# Altium PCB Arduino Demo Shield PCB.PcbDoc
Units mil, origin at the board's own origin, x right, y up, seen from the top; angles counter-clockwise.
Board outline 6000 x 4000 mil, 2 copper layers (Top Layer, Bottom Layer); 10 components, 8 nets, 69 pads, 0 vias.
Unrouted connection lines stored in the file: 3.
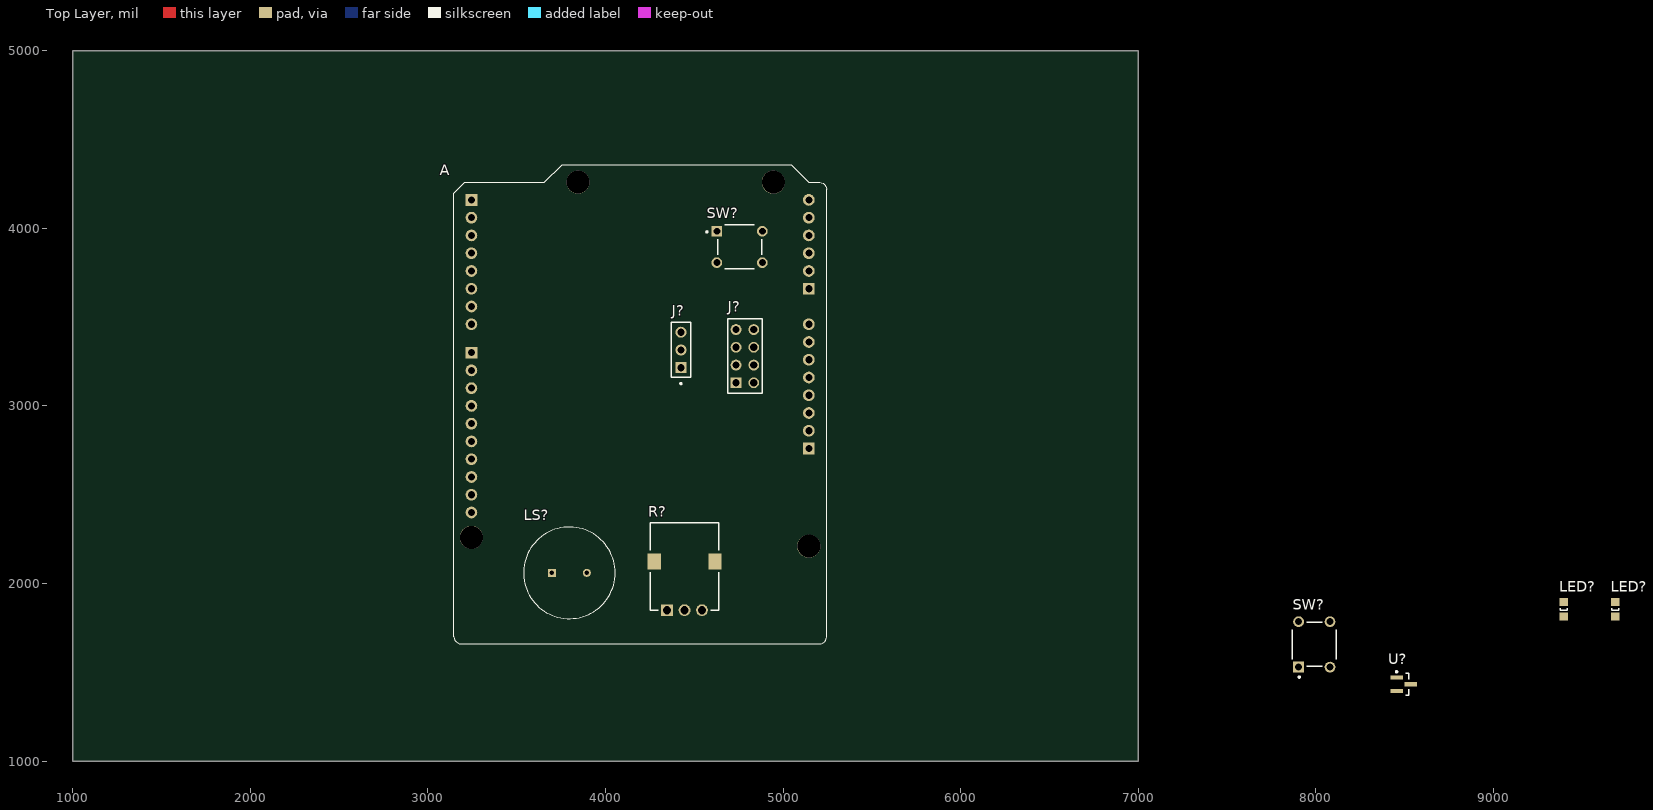
[diagram p0: Top Layer view]
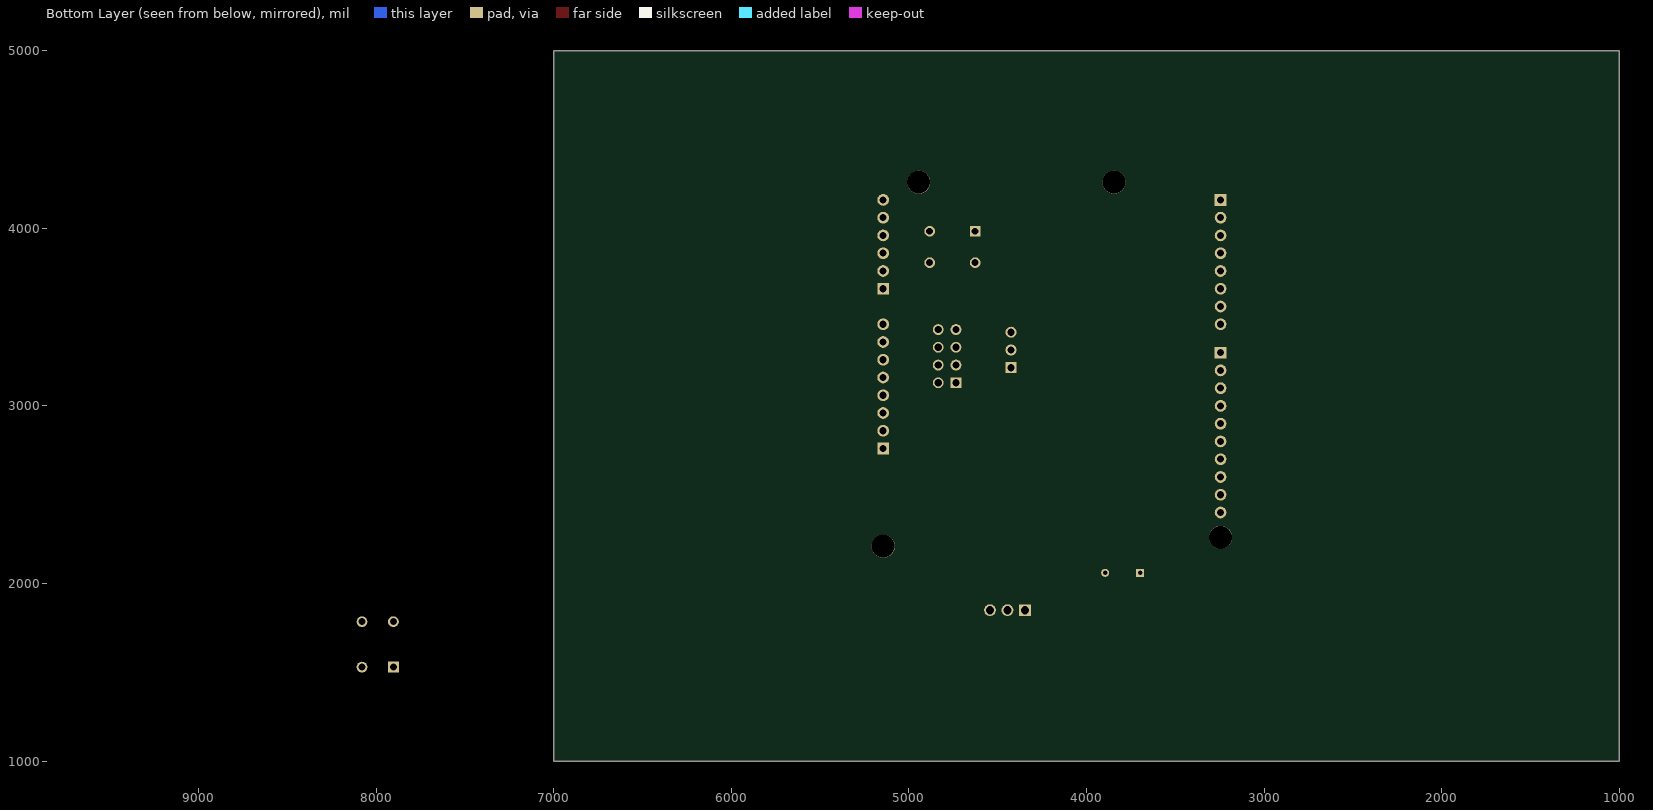
[diagram p1: Bottom Layer view, seen from below]

## Layer stack, top to bottom
Top Solder: solder mask 0.4, Solder Resist, Dk 3.5
Top Layer: signal copper 1.4
Dielectric 1: dielectric 12.6, FR-4, Dk 4.8
Bottom Layer: signal copper 1.4
Bottom Solder: solder mask 0.4, Solder Resist, Dk 3.5

## Board outline
1000,1000 7000,1000 7000,5000 1000,5000

## Design rules (kind name [scope] priority, off if disabled: settings)
Clearance [All] p1: gap=10 ignorepadtopadclearanceinfootprint=FALSE except(0: Arc-Hole Track-Hole SMDPad-Hole THPad-Hole Via-Hole Fill-Hole Poly-Hole Region-Hole Text-Hole)
PolygonConnect [All] p1: connectstyle=Relief reliefconductorwidth=10 reliefentries=4 polygonreliefangle="90 Angle" airgapwidth=10
RoutingVias [All] p1: holewidth=28 width=50 viastyle="Through Hole" minholewidth=28 minwidth=50 maxholewidth=28 maxwidth=50
SolderMaskExpansion [All] p1: expansion=4 istentingtop=FALSE
Width [All] p1: maxlimit=10 minlimit=10 preferedwidth=10
30 further rules are at their usual default settings.

## Classes and differential pairs
component class "Arduino Demo Shield": A J? LED? LS? R? SW? U?

## Components (designator, comment, footprint, x,y, rotation, side; value= is the part's Value field where it differs from the comment)
A "A000066" ARDUINO_A000066 5245,1660 r90 top
J? "Servo Connector" FP-22-28-4030-MFG 4425,3315 r90 top
J? "NRF24l01 Connect" SMTC-SSW-104-01-X-D 4735,3130 r90 top
LED? "Green LED" 0805_A 9395,1855 r90 top
LED? "Blue LED" 0805_A 9685,1855 r90 top
LS? "Buzzer" FP-PKM13EPYH4002-B0-MFG 3796.57,2060 r0 top
R? "10k Pot" RES-POT-3 4445,2125 r0 top
SW? "reset" FP-1825910-2-0 7991.42,1657.05 r90 top
SW? "Pushbutton" FP-1825910-2-0 4755,3895 r0 top
U? "Thermistor" SOT-23-TT3_M 8494.37,1432.6 r0 top

## Footprints (in the part's own frame and the unit in brackets; to place one, negate y for a bottom-side part, rotate by r counter-clockwise, add the part's x,y. Pads: shape width x height; smd on the part's side, far side on the other; paste and mask are expansions set on the pad)
0805_A [mm] "Chip LED, 2-Leads, Body 2.0x1.3mm, IPC Medium Density"
  rect 1.1x1.2 smd: 1(-1.05,0) 2(1.05,0)
  silkscreen extent -0.15,-0.5 0.15,0.5, body extent -1,-0.62 1,0.63, height 0.68
ARDUINO_A000066 [mil]
  round 66 hole 40: 3V3(1400,100) 5V(1500,100) A1(2100,100) A2(2200,100) A3(2300,100) A4(2400,100) A4(SDA)(840,2000) A5(2500,100) A5(SCL)(740,2000) AREF(940,2000) D1(2400,2000) D2(2300,2000) D3(2200,2000) D4(2100,2000) D5(2000,2000) D6(1900,2000) D7(1800,2000) D9(1540,2000) D10(1440,2000) D11(1340,2000) D12(1240,2000) D13(1140,2000) GND_1(1700,100) GND_2(1600,100) GND_3(1040,2000) IOREF(1200,100) RST(1300,100) VIN(1800,100)
  rect 66x66 hole 40: A0(2000,100) D0(2500,2000) D8(1640,2000) P1(1100,100)
  round 129.92 hole 129.92 unplated: ""(550,100) ""(600,2000) ""(2600,300) ""(2600,1400)
  silkscreen extent 0,0 2698,2098
FP-22-28-4030-MFG [mm]
  rect 1.57x1.57 hole 1.02 paste-1000 mask+0: 1(-2.54,0)
  round 1.57 hole 1.02 paste-1000 mask+0: 2(0,0) 3(2.54,0)
  silkscreen extent -4.92,-1.37 3.94,1.37, body extent -4.04,-1.47 4.04,1.47, height 0.25
FP-1825910-2-0 [mm]
  rect 1.54x1.54 hole 0.99 paste-1000 mask+0: 1(-3.25,2.25)
  round 1.54 hole 0.99 paste-1000 mask+0: 2(3.25,2.25) 3(-3.25,-2.25) 4(3.25,-2.25)
  silkscreen extent -4.79,-3.15 3.15,3.15, body extent -4.12,-3.24 4.12,3.24, height 0.25
FP-PKM13EPYH4002-B0-MFG [mm]
  rect 1.15x1.15 hole 0.65 paste-1000 mask+0: 1(-2.5,0)
  round 1.15 hole 0.65 paste-1000 mask+0: 2(2.5,0)
  silkscreen extent -6.55,-6.55 6.55,6.55, body extent -6.65,-6.65 6.65,6.65, height 0.25
RES-POT-3 [mm] "POT, 3-Leads, Body 9.8x12.5mm, Pitch 2.5mm"
  rect 1.7x1.7 hole 1.2: 1(-2.5,-7)
  round 1.7 hole 1.2: 2(0,-7) 3(2.5,-7)
  rect 1.9x2.3 smd: MP1(-4.35,0) MP2(4.35,0)
  silkscreen extent -4.9,-7 4.9,5.5, body extent -4.9,-7 4.9,5.5, height 26.8
SMTC-SSW-104-01-X-D [mm] "SQ Post Socket, 2x4 Pins, Vertical, 2.54mm Pitch, Female"
  rect 1.55x1.55 hole 1.04: 1(0,0)
  round 1.55 hole 1.04: 2(0,-2.54) 3(2.54,0) 4(2.54,-2.54) 5(5.08,0) 6(5.08,-2.54) 7(7.62,0) 8(7.62,-2.54)
  silkscreen extent -1.53,-3.74 9.15,1.2, body extent -1.52,-3.75 9.14,1.21, height 8.51
SOT-23-TT3_M [mm] "SOT23, 3-Leads, Body 2.9x1.3mm, Pitch 0.95mm, Lead Span 2.4mm, IPC Low Density"
  rect 1.8x0.6 smd: 1(-1,0.95) 2(-1,-0.95) 3(1,0)
  silkscreen extent -1.12,-1.55 0.7,1.92, body extent -0.7,-1.52 0.7,1.53, height 1.12

## Part data
A: "ATmega328P Arduino Uno R3 AVRÂ® ATmega AVR MCU 8-Bit Embedded Evaluation Board", Package=None, Availability=Unavailable, MF=Arduino, MP=A000066, Price=None, SnapEDA_Link=https://www.snapeda.com/parts/A000066/Arduino/view-part/557638/?ref=snap
J?: library part CMP-04776-000098-1, "CONN HEADER VERT 3POS 2.54MM", Current Rating=4A, Manufacturer=Molex, Manufacturer Part Number=22-28-4030, Temperature="-40°C to +80°C", Temperature Range High=+80°C, Temperature Range Low=-40°C, Voltage Rating=500V, Automotive=No, Category=Conn, ComponentLink2Description=Datasheet, ComponentLink2URL=https://www.molex.com/webdocs/datasheets/pdf/en-us/0022284030_PCB_HEADERS.pdf, Conn Gender=Male, Conn Orientation=Vertical, Contact Material=Gold,Nickel, Device Class L1=Connectors, Device Class L2="Headers and Wire Housings", Device Class L3=unset, Digikey Description="CONN HEADER VERT 3POS 2.54MM", Footprint Url=https://www.molex.com/pdm_docs/sd/022284030_sd.pdf, Height=8.88mm, Lead Free=Yes, Mouser Description="Headers & Wire Housings 3P VERT HEADER Sn", Number Of Contacts=3, Number Of Rows=1, Octopart=https://octopart.com/0022284030-molex-10476094, Package=22-28-4030, Pitch=2.54mm, RoHS=TRUE
J?: library part CMP-1023-00339-1, "SQ Post Socket, Through-hole, Vertical, -55 to 105 degC, 2.54mm Pitch, 8-Pin, Female, RoHS", Manufacturer=Samtec, PartNumber=SSW-104-01-T-D, Temperature Range="-55 to 105 degC", ComponentLink1Description="Manufacturer URL", ComponentLink1URL=http://www.samtec.com, ComponentLink2Description=Datasheet, ComponentLink2URL=http://www.samtec.com/documents/webfiles/pdf/SSW_TH.PDF, ComponentLink3Description="Package Specification", ComponentLink3URL=http://www.samtec.com/documents/webfiles/cpdf/SSW-1XX-XX-XXX-X-XX-XXX-XX-MKT.pdf, DatasheetVersion=F-214, Mounting Technology=Through-hole, Orientation=Vertical, PackageDescription="Assembly, Socket Strip .016 X .031 Tail", PackageReference=SSW-104-01-X-D, PackageVersion="CA, 6/1987", Pitch="2.54 mm", RoHS=True
LED?: library part CMP-1426-00007-1, "SMD mono-color Chip LED, WL-SMCW, Green", Color=Green, Manufacturer="Wuerth Elektronik", PartNumber=150080GS75000, ComponentLink1Description="Manufacturer URL", ComponentLink1URL=http://www.we-online.com, ComponentLink2Description=Datasheet, ComponentLink2URL=http://katalog.we-online.com/led/datasheet/150080GS75000.pdf, PackageReference=0805_A
LED?: library part CMP-1426-00008-1, "SMD mono-color Chip LED, WL-SMCW, Blue", Color=Blue, Manufacturer="Wuerth Elektronik", PartNumber=150080BS75000, ComponentLink1Description="Manufacturer URL", ComponentLink1URL=http://www.we-online.com, ComponentLink2Description=Datasheet, ComponentLink2URL=http://katalog.we-online.com/led/datasheet/150080BS75000.pdf, PackageReference=0805_A
LS?: library part CMP-06202-000007-1, "AUDIO PIEZO TRANSDUCER 30V TH", Frequency=4kHz, Max Operating Temperature=85°C, Max Supply Voltage=30V, Min Operating Temperature=-40°C, Nominal Input Voltage=3V, Package Quantity=1980, Diameter=12.6mm, Height=6.9mm, Lead Free="Lead Free", Max Frequency=4kHz, Mount="Through Hole", Packaging=Bulk, Radiation Hardening=No, REACH SVHC="No SVHC", Self Resonant Frequency=4kHz, Termination=Solder, Voltage Rating=3V, Voltage Rating (DC)=30V, Washable=No
R?: library part CMP-2000-06871-1, "9 mm Rotary Potentiometer, Insulated Shaft, Conductive Plastic Element, 10 KOhm, -20 to 70 degC, 3-Pin THD, RoHS, Tray", Manufacturer="BI Technologies", Package Description="POT, 3-Leads, Body 9.8 x 12.5 mm, Pitch 2.5 mm", Package Reference=POT-3, Power (Watts)=0.03W,1/32W, Power Rating=0.03W, Resistance (Ohms)=10k, Resistive Material=ConductivePlastic, Standard Package=1, Temperature Coefficient=-, Tolerance=±20%, Actuator Diameter="0.236\"(6.00mm)", Actuator Length="0.787\"(20.00mm)", Actuator Type=Knurled, Adjustment Type=TopAdjustment, Built in Switch=Detent, Bushing Thread=-, Category=Potentiometers,VariableResistors, Datasheet URL=http://www.bitechnologies.com/pdfs/p090.pdf, Datasheet Version=07/2008, Family=RotaryPotentiometers,Rheostats, Manufacturer URL=http://www.bi-technologies.net/, Mounting Technology=ThroughHole, Mounting Type=ThroughHole, Number of Gangs=1, Number of Turns=1, Online Catalog=P090Series, Other Names=987-1277P090S14T20BR10K, Package URL=http://www.bitechnologies.com/pdfs/p090.pdf, Packaging=Tray, Rotation=280°, Series=P090, Taper=Linear, Termination Style=PCBPins,BoardLocks
SW? SW?: library part CMP-03407-000004-1, "SWITCH TACTILE SPST-NO 0.05A 24V", Contact Current Rating=50mA, Contact Resistance=100mΩ, Manufacturer=TE, Manufacturer Part Number=1825910-2, Operating Force=160gf, Package=0, Temperature="-35°C to +85°C", Temperature Range High=+85°C, Temperature Range Low=-35°C, Voltage Rating Dc=24V, Automotive=No, Category=Switch, ComponentLink2Description=Datasheet, ComponentLink2URL=https://www.te.com/commerce/DocumentDelivery/DDEController?Action=showdoc&DocId=Customer+Drawing%7F1825910%7FC10%7Fpdf%7FEnglish%7FENG_CD_1825910_C10.pdf%7F1825910-2, Device Class L1=Electromechanical, Device Class L2=Switches, Device Class L3="Tactile Switches", Digikey Description="SWITCH TACTILE SPST-NO 0.05A 24V", Electromechanical Life=100000Cycles, Height=4.6mm, Lead Free=Yes, Mount="Through Hole", Octopart=https://octopart.com/1825910-2-te+connectivity-42270502, RoHS=TRUE, Throw Configuration=SPST-NO
U?: library part CMP-0192-00221-1, "Low-Power Linear Active Thermistor IC, 3-Pin SOT-23, Extended Temperature, Tape and Reel", Code_IPC=SOT23-3, DatasheetVersion="revE, Apr-2009", PackageDescription="3-Lead Plastic Small Outline Transistor (TT) [SOT-23]", PackageReference=SOT-23-TT3, PackageVersion="revBB, Aug-2009"

## Nets (pads, with @x,y where several pads share a name; then routed paths per layer and width w, separated by ;. In a path a pad name is that pad's centre, name@x,y a point inside that pad or via, vN(x,y) a via of type N, cw(c..) or ccw(c..) an arc to the next point about the centre after c; other vN are vias at no path point)
+3.3: J?.1@4735,3130
+5: A.5V
CE: J?.4
CSN: J?.3@4735,3230
GND: A.GND_1 A.GND_2 A.GND_3 J?.2@4835,3130
MISO: J?.8
MOSI: J?.5
SCK: J?.6
pads on no net: A. A.3V3 A.A0 A.A1 A.A2 A.A3 A.A4 A.A4(SDA) A.A5 A.A5(SCL) A.AREF A.D0 A.D1 A.D2 A.D3 A.D4 A.D5 A.D6 A.D7 A.D8 A.D9 A.D10 A.D11 A.D12 A.D13 A.IOREF A.P1 A.RST A.VIN J?.1@4425,3215 J?.2@4425,3315 J?.3@4425,3415 J?.7 LED?.1 LED?.2 LS?.1 LS?.2 R?.1 R?.2 R?.3 R?.MP1 R?.MP2 SW?.1 SW?.2 SW?.3 SW?.4 U?.1 U?.2 U?.3